# EAGLE board XBee Breakout manufactured 2016-10-25 (EAGLE 7.6.0)
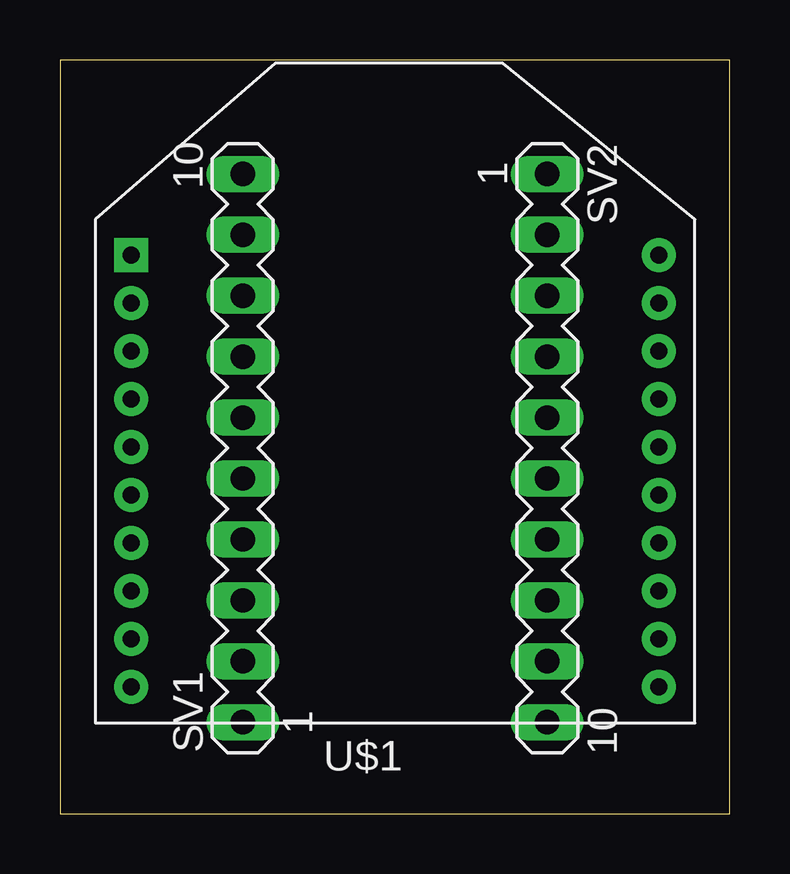
[diagram p0: board, top side]
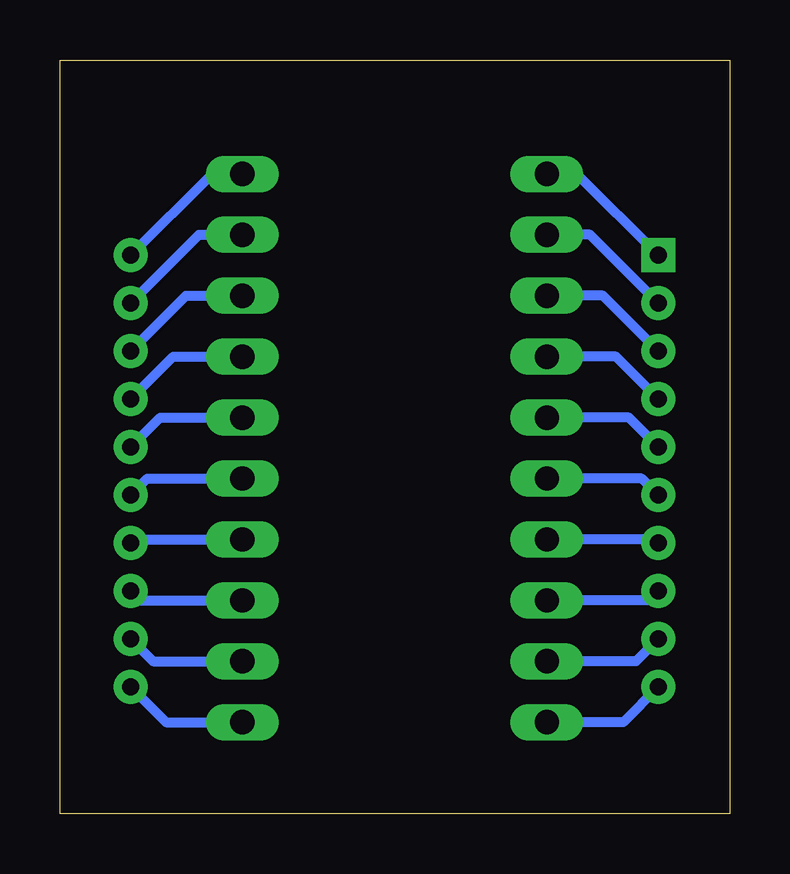
[diagram p1: board, bottom side, seen from below]

Size 27.92 x 31.42 mm. Coordinates in mm from the lower left corner, seen from the top.
Outline: 0,0 27.92,0 27.92,31.42 0,31.42 0,0
Copper layers (1*16): Top 0.035mm / dielectric 1.5mm / Bottom 0.035mm
Design rules "default": minimum track width 10mil, minimum drill 24mil, track to track 8mil, track to pad 8mil, pad to pad 8mil, via to via 8mil, smd to smd 8mil, copper to edge 40mil, drill to drill 8mil, minimum pad ring 10mil, minimum via ring 8mil, stop-mask expansion 4mil, vias tented up to drill 0mil, thermal gap 10mil

## Footprints (pad centres in the part's own frame; a part is rotated, then mirrored left to right if it is on the bottom)
MA10-1 = drill 1.016 long: 1 -11.43,0; 2 -8.89,0; 3 -6.35,0; 4 -3.81,0; 5 -1.27,0; 6 1.27,0; 7 3.81,0; 8 6.35,0; 9 8.89,0; 10 11.43,0
XBEE = drill 0.7 pad 1.422 square: 1 -11,5.5 | drill 0.7 pad 1.422: 2 -11,3.5; 3 -11,1.5; 4 -11,-0.5; 5 -11,-2.5; 6 -11,-4.5; 7 -11,-6.5; 8 -11,-8.5; 9 -11,-10.5; 10 -11,-12.5; 11 11,-12.5; 12 11,-10.5; 13 11,-8.5; 14 11,-6.5; 15 11,-4.5; 16 11,-2.5; 17 11,-0.5; 18 11,1.5; 19 11,3.5; 20 11,5.5

## Placement (x,y rotation side)
SV1  [MA10-1]  7.62,15.24 90 top
SV2  [MA10-1]  20.32,15.24 270 top
U$1  XBEE  [XBEE]  13.97,17.78 0 top

## Library data of the parts
SV1 SV2 = con-lstb; OC_FARNELL: unknown; OC_NEWARK: unknown
U$1 = HyTechDevices

## Nets
GND: SV1.1 U$1.10
N$1: SV1.2 U$1.9
N$2: SV1.3 U$1.8
N$3: SV1.4 U$1.7
N$4: SV1.5 U$1.6
N$5: SV1.6 U$1.5
N$6: SV1.7 U$1.4
N$7: SV1.8 U$1.3
N$8: SV1.9 U$1.2
N$9: SV2.1 U$1.20
N$10: SV2.2 U$1.19
N$11: SV2.3 U$1.18
N$12: SV2.4 U$1.17
N$13: SV2.5 U$1.16
N$14: SV2.6 U$1.15
N$16: SV2.7 U$1.14
N$17: SV2.8 U$1.13
N$18: SV2.9 U$1.12
N$19: SV2.10 U$1.11
VCC: SV1.10 U$1.1

## Tracks (layer width: path | path; a pad name or v marks a point on that pad's centre or on a via)
GND
  Bottom 0.406: U$1.10 4.44,3.81 SV1.1
N$1
  Bottom 0.406: U$1.9 3.9,6.35 SV1.2
N$2
  Bottom 0.406: U$1.8 3.36,8.89 SV1.3
N$3
  Bottom 0.406: U$1.7 3.12,11.43 SV1.4
N$4
  Bottom 0.406: U$1.6 3.66,13.97 SV1.5
N$5
  Bottom 0.406: U$1.5 4.2,16.51 SV1.6
N$6
  Bottom 0.406: U$1.4 4.74,19.05 SV1.7
N$7
  Bottom 0.406: U$1.3 5.28,21.59 SV1.8
N$8
  Bottom 0.406: U$1.2 5.82,24.13 SV1.9
N$9
  Bottom 0.406: U$1.20 21.58,26.67 SV2.1
N$10
  Bottom 0.406: U$1.19 22.12,24.13 SV2.2
N$11
  Bottom 0.406: U$1.18 22.66,21.59 SV2.3
N$12
  Bottom 0.406: U$1.17 23.2,19.05 SV2.4
N$13
  Bottom 0.406: U$1.16 23.74,16.51 SV2.5
N$14
  Bottom 0.406: U$1.15 24.28,13.97 SV2.6
N$16
  Bottom 0.406: U$1.14 24.82,11.43 SV2.7
N$17
  Bottom 0.406: U$1.13 24.58,8.89 SV2.8
N$18
  Bottom 0.406: U$1.12 24.04,6.35 SV2.9
N$19
  Bottom 0.406: U$1.11 23.5,3.81 SV2.10
VCC
  Bottom 0.406: U$1.1 6.36,26.67 SV1.10